# EAGLE board emat_igbt_switch_schmitt_trigger (EAGLE 9.2.2)
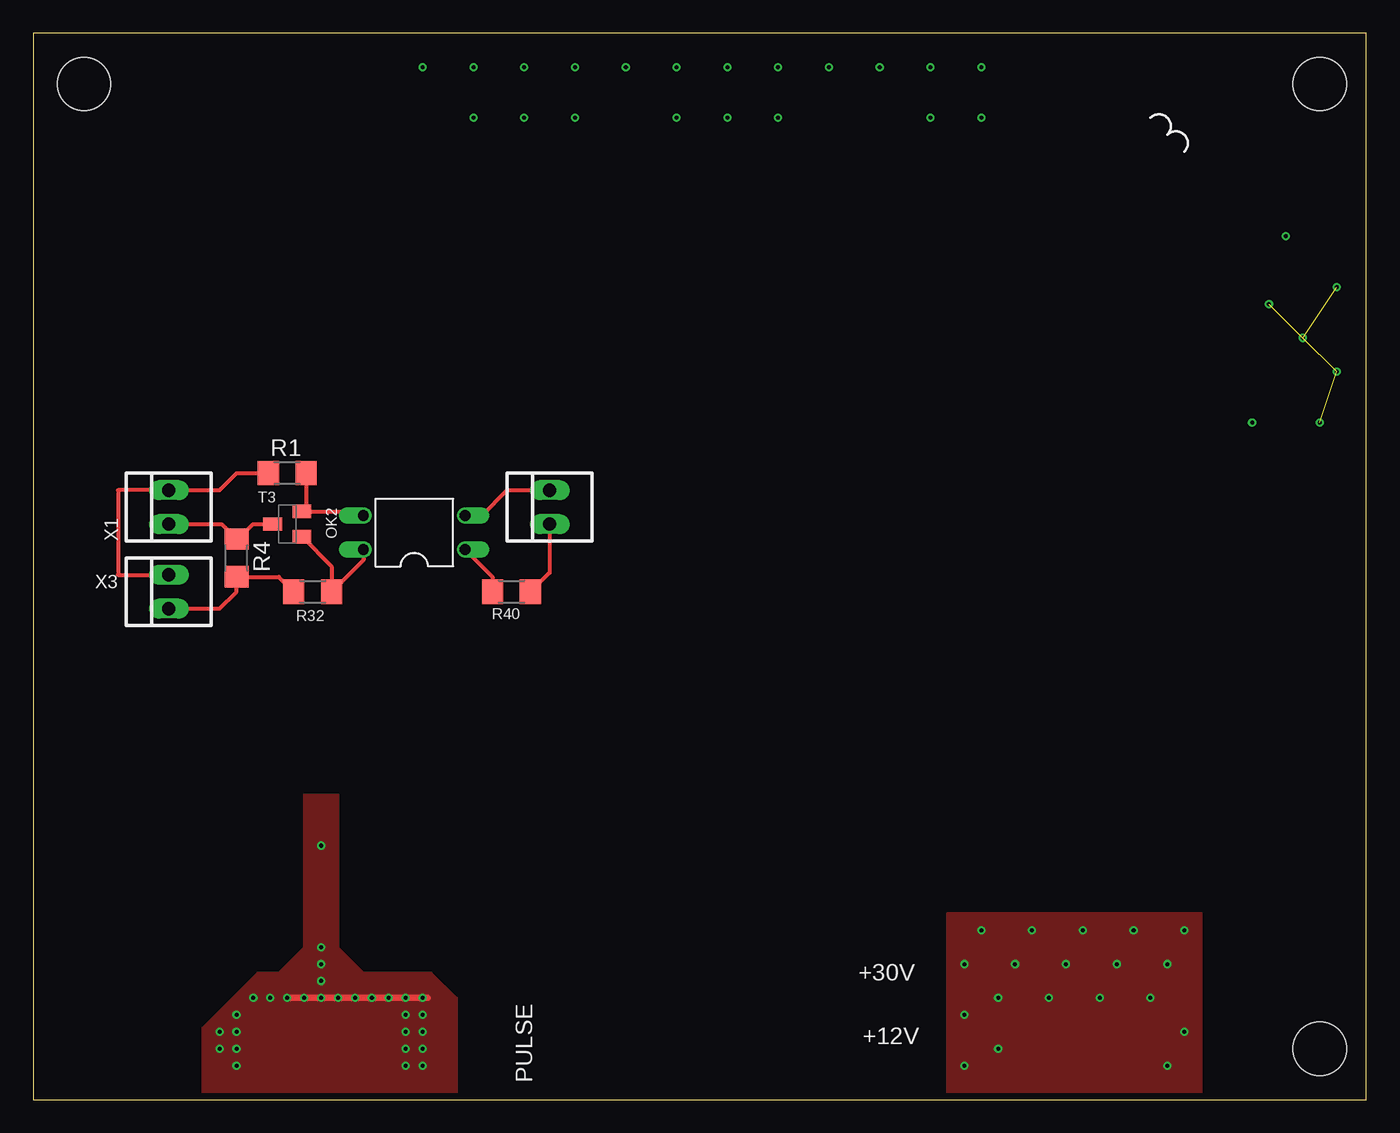
[diagram p0: board, top side]
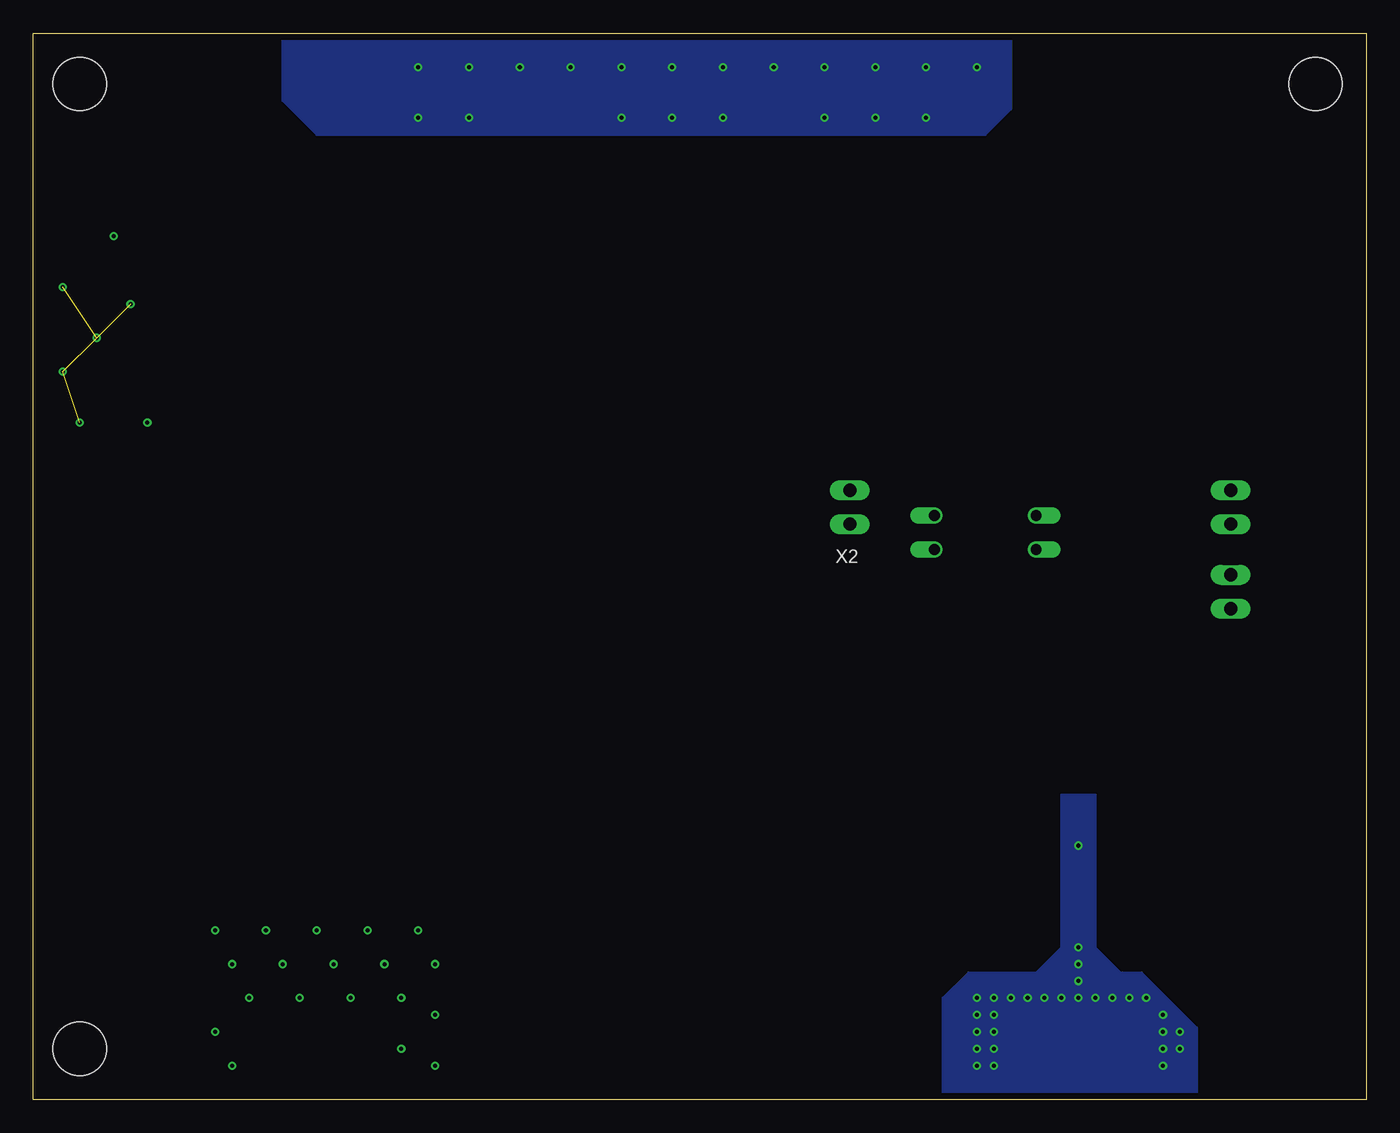
[diagram p1: board, bottom side, seen from below]

Size 100 x 80 mm. Coordinates in mm from the lower left corner, seen from the top.
Outline: 0,0 100,0 100,80 0,80 0,0
Copper layers (1*16): Top 0.035mm / dielectric 1.6mm / Bottom 0.035mm
Design rules "Elecrow_2-layer_PCB_eagle_rule *": minimum track width 6mil, minimum drill 12mil, track to track 0.3mm, track to pad 0.3mm, pad to pad 0.3mm, via to via 0.3mm, smd to smd 0mil, copper to edge 20mil, drill to drill 10mil, minimum pad ring 6mil, minimum via ring 6mil, stop-mask expansion 0mil, vias tented up to drill 100mil, thermal gap 10mil
Net classes: 0 default: width 0.3 mm, drill 0.3 mm, clearance 0.3 mm
Holes 4 mm at 3.81,76.2 96.52,3.81 96.52,76.2

## Footprints (pad centres in the part's own frame; a part is rotated, then mirrored left to right if it is on the bottom)
DIL04 = drill 0.813 offset: 1 -1.27,-3.81; 2 1.27,-3.81; 3 1.27,3.81; 4 -1.27,3.81
R1206 = smd 1.6 x 1.803: 1 -1.422,0; 2 1.422,0
SOT23-BEC = smd 1 x 1.4: B -0.95,-1.1; C 0,1.1; E 0.95,-1.1
22-23-2021 = drill 1 long: 1 -1.27,0; 2 1.27,0

## Placement (x,y rotation side)
OK2  PC817  [DIL04]  28.57,42.55 90 top
R1  51  [R1206]  19.05,46.99 0 top
R4  510  [R1206]  15.24,40.64 270 top
R32  4.7K  [R1206]  20.95,38.1 180 top
R40  100  [R1206]  35.88,38.1 180 top
T3  BC847  [SOT23-BEC]  19.05,43.18 90 top
X1  CON_PULSE_OUT  [22-23-2021]  10.16,44.45 90 top
X2  CON_PULSE_IN  [22-23-2021]  38.73,44.45 90 top
X3  CON_+12V  [22-23-2021]  10.16,38.1 90 top

## Library data of the parts
OK2 = optocoupler; MPN: PC817X4J000F; OC_FARNELL: 9707727; OC_NEWARK: 97K7059
R1 R4 R32 = rcl
R40 = resistor
T3 = DC_LOAD_AU
X1-X3 = con-molex; MF: MOLEX; MPN: 22-23-2021; OC_FARNELL: 1462926; OC_NEWARK: 25C3832

## Nets
+12V: R4.2 R32.2 X3.1
GND: R1.1 X1.2 X3.2
N$1: OK2.3 R1.2 T3.E
N$2: R4.1 T3.C X1.1
N$13: OK2.2 X2.2
N$17: OK2.4 R32.1 T3.B
N$31: R40.1 X2.1
N$32: OK2.1 R40.2

## Tracks (layer width: path | path; a pad name or v marks a point on that pad's centre or on a via)
+12V
  Top 0.3: X3.1 13.97,36.83 15.24,38.1 R4.2 18.41,39.22 R32.2
GND
  Top 0.3: R1.1 15.24,46.99 13.97,45.72 X1.2 6.35,45.72 6.35,39.37 X3.2
N$1
  Top 0.3: R1.2 20.47,44.45 T3.E 24.45,44.13 OK2.3
N$2
  Top 0.3: T3.C 16.51,43.18 15.39,42.06 R4.1 14.12,43.18 X1.1
N$3  (via drill 0.3)  (4 unrouted)
  other vias: 92.71,59.69 97.79,60.96 95.25,57.15 97.79,54.61 96.52,50.8
N$5  (via drill 0.3)
  other vias: 93.98,64.77
N$6  (via drill 0.3)
  other vias: 91.44,50.8
N$7  (via drill 0.3)
  other vias: 29.21,77.47 33.02,77.47 36.83,77.47 40.64,77.47 44.45,77.47 48.26,77.47 52.07,77.47 55.88,77.47 59.69,77.47 63.5,77.47 67.31,77.47 33.02,73.66 36.83,73.66 40.64,73.66 48.26,73.66 52.07,73.66 55.88,73.66 67.31,73.66 71.12,77.47 71.12,73.66
  pour Bottom (no thermals): 26.67,80.01 26.67,74.3 28.57,72.39 78.74,72.39 81.28,74.93 81.28,80.01
N$8  (via drill 0.3)
  Top 0.5: v19.05,7.62 29.59,7.62
  other vias: 15.24,6.35 15.24,5.08 15.24,3.81 15.24,2.54 13.97,3.81 13.97,5.08 16.51,7.62 17.78,7.62 20.32,7.62 21.59,7.62 22.86,7.62 25.4,7.62 24.13,7.62 26.67,7.62 27.94,7.62 27.94,6.35 27.94,5.08 27.94,3.81 27.94,2.54 29.21,2.54 29.21,3.81 29.21,5.08 29.21,6.35 29.21,7.62 21.59,8.89 21.59,10.16 21.59,11.43 21.59,19.05
  pour Bottom (isolate 0.3, no thermals): 20.32,22.86 22.86,22.86 22.86,11.43 24.77,9.53 29.84,9.53 31.75,7.62 31.75,0 12.7,0 12.7,5.4 16.83,9.53 18.41,9.53 20.32,11.43
  pour Top (isolate 0.3, no thermals): 20.32,22.86 22.86,22.86 22.86,11.43 24.77,9.53 29.84,9.53 31.75,7.62 31.75,0 12.7,0 12.7,5.4 16.83,9.53 18.41,9.53 20.32,11.43
N$9  (via drill 0.3)
  other vias: 69.85,2.54 85.09,2.54 72.39,3.81 69.85,6.35 72.39,7.62 76.2,7.62 80.01,7.62 83.82,7.62 69.85,10.16 71.12,12.7 73.66,10.16 74.93,12.7 77.47,10.16 78.74,12.7 81.28,10.16 82.55,12.7 85.09,10.16 86.36,12.7 86.36,5.08
  pour Top (no thermals): 68.58,0 68.58,13.97 87.63,13.97 87.63,0
N$13
  Top 0.3: OK2.2 33.66,43.81 35.56,45.72 X2.2
N$17
  Top 0.3: T3.B 22.38,40 R32.1 24.77,40.49 OK2.4
N$31
  Top 0.3: X2.1 38.73,39.53 R40.1
N$32
  Top 0.3: OK2.1 34.46,39.2 R40.2

## Text on the board
tNames: +30V | +12V | PULSE